# Altium PCB Apollo_ES_Board-V1.1 1.PcbDoc (part 1 of 3)
Units mil, origin at the board's own origin, x right, y up, seen from the top; angles counter-clockwise.
Board outline 984.25 x 614.17 mil, 4 copper layers (Top, Inner Layer 2, Inner Layer 3, Bottom), stack 4.71 mil thick; 86 components, 58 nets, 348 pads, 1209 vias.
Unrouted connection lines stored in the file: 448.
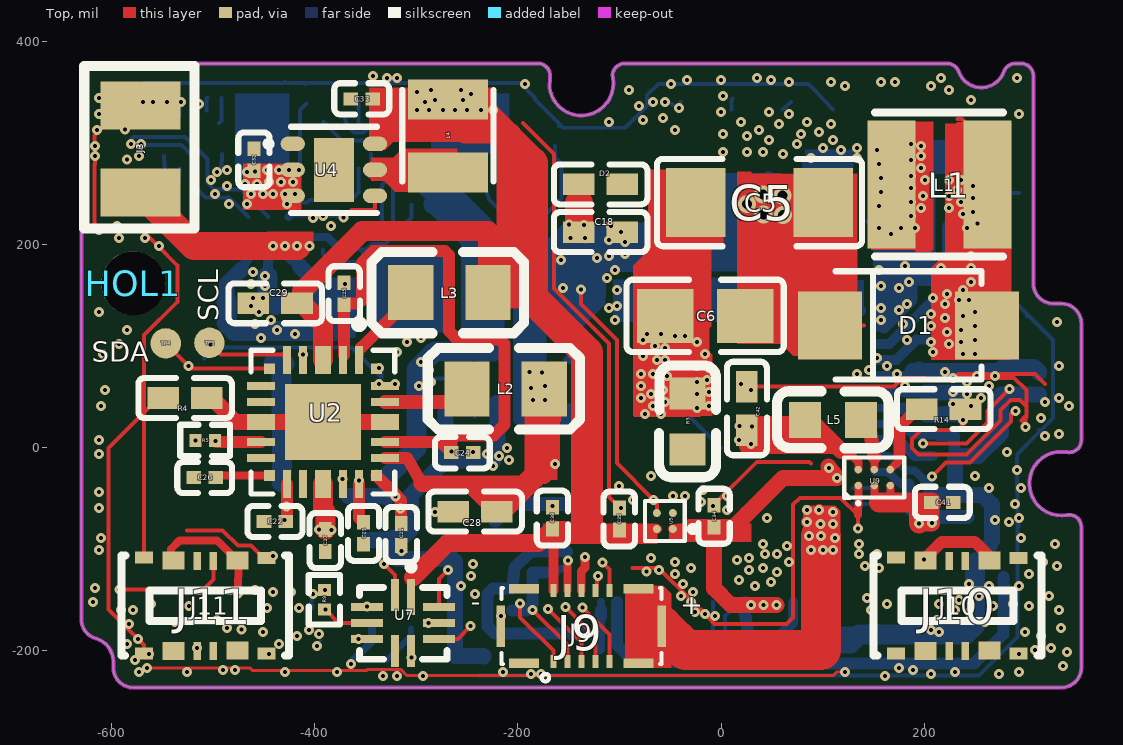
[diagram p0: Top view]
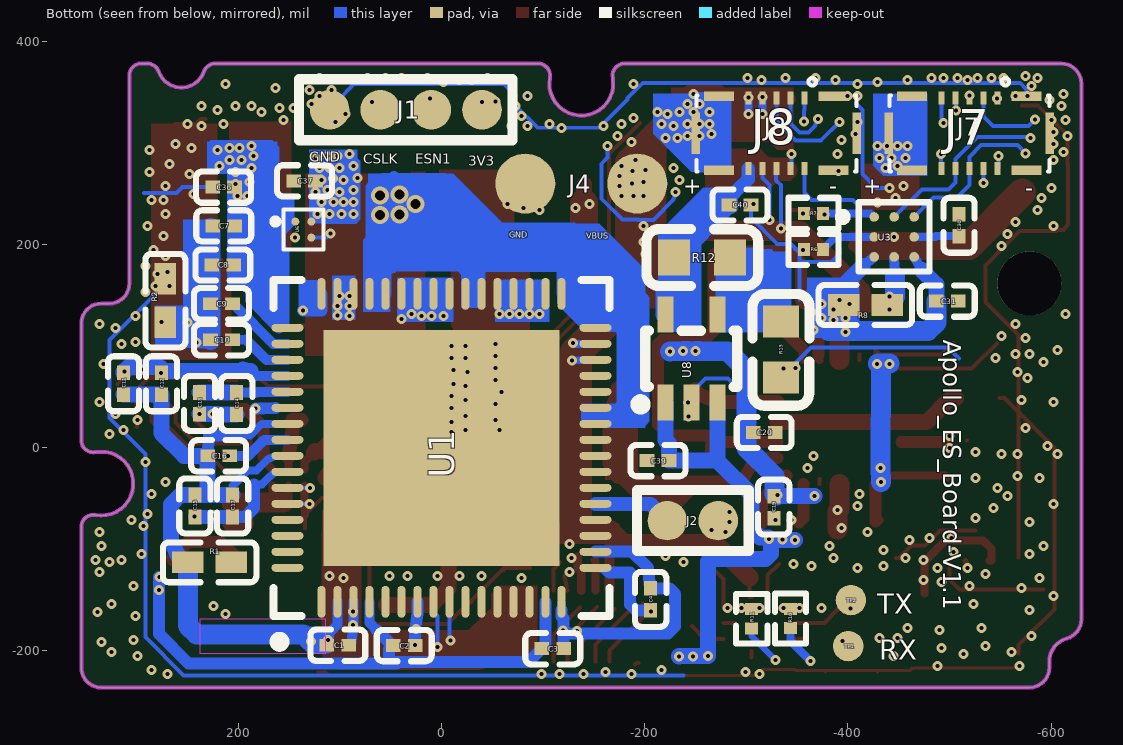
[diagram p1: Bottom view, seen from below]
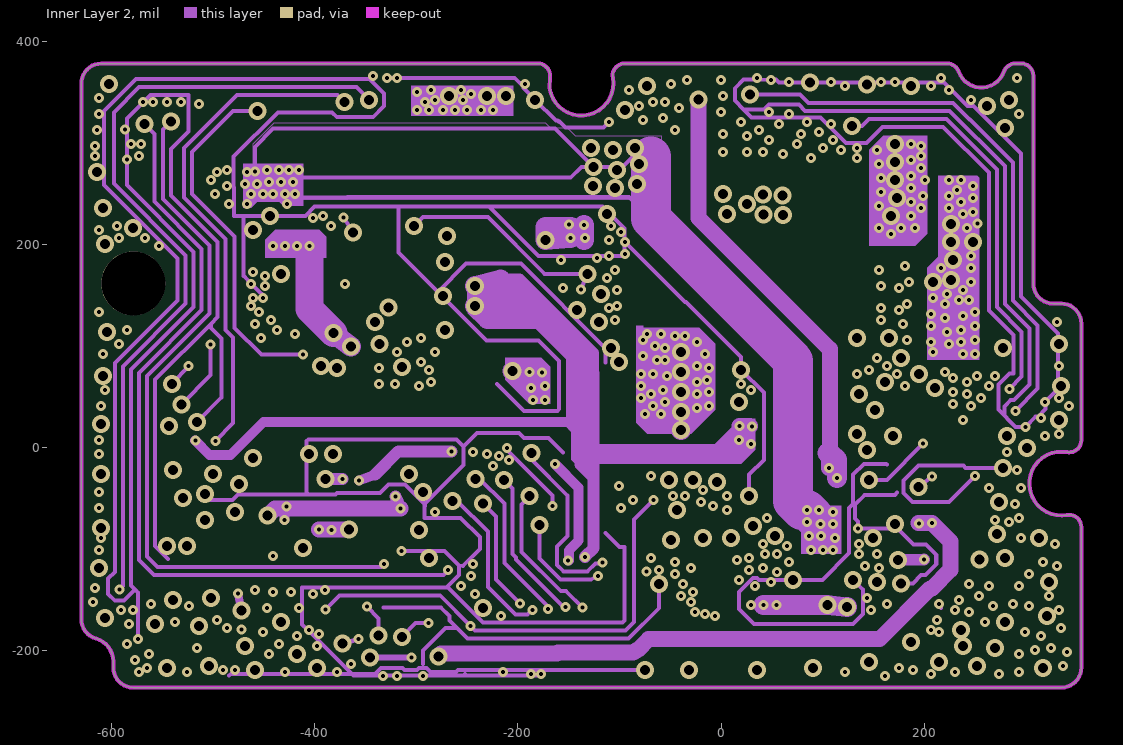
[diagram p2: Inner Layer 2]
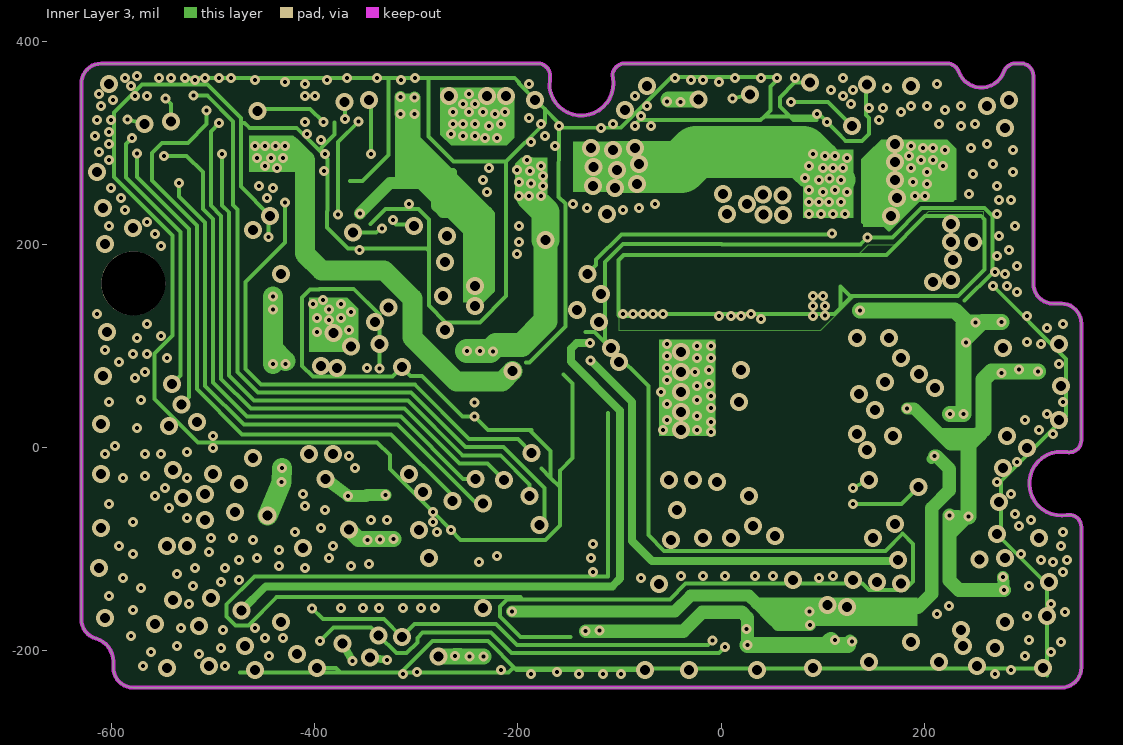
[diagram p3: Inner Layer 3]

## Layer stack, top to bottom
Solder Mask Top: solder mask 0.4, Solder Resist, Dk 3.5
Top: signal copper 1.38
Inner Layer 2: signal copper 0.6
Inner Layer 3: signal copper 1.35
Bottom: signal copper 1.38
Solder Mask Bottom: solder mask 0.4, Solder Resist, Dk 3.5

## Board outline
-598.28,-210.44 ccw(c-621.9,-210.44) -615.47,-187.71 -615.45,-187.71 cw(c-610.09,-168.77) -629.77,-168.77 -629.77,358.46 cw(c-610.09,358.46) -610.09,378.15 -180.23,378.15 cw(c-180.23,366.34) -168.62,364.18 -168.85,354.19 ccw(c-137.65,358.46) -106.68,364.2 -106.68,364.18 cw(c-95.04,366.32) -95.06,378.15 222.64,378.15 cw(c222.64,366.33) 233.78,370.27 233.79,370.26 ccw(c256.05,378.15) 278.33,370.3 278.32,370.27 cw(c289.47,366.33) 289.47,378.15 295.42,378.15 cw(c295.42,366.33) 307.23,366.35 307.23,161.61 ccw(c326.92,161.61) 326.92,141.93 334.79,141.93 cw(c334.79,122.24) 354.48,122.24 354.48,7.35 cw(c342.67,7.35) 340.51,-4.27 330.53,-4.03 ccw(c334.8,-35.24) 340.54,-66.21 340.51,-66.21 cw(c342.67,-77.82) 354.48,-77.82 354.48,-216.34 cw(c334.79,-216.34) 334.79,-236.03 -578.59,-236.03 cw(c-578.59,-216.34) -598.28,-216.34

## Design rules (kind name [scope] priority, off if disabled: settings)
Clearance "Clearance - Default - DEFAULT- SMD" [IsVia vs IsSMTPin] p1: gap=0 ignorepadtopadclearanceinfootprint=FALSE
Clearance "Clearance - Default - DEFAULT - Via" [IsVia vs IsVia] p2: gap=0 ignorepadtopadclearanceinfootprint=FALSE
Clearance "Clearance - Default - DEFAULT - Net" [All] p3: gap=3.94 ignorepadtopadclearanceinfootprint=FALSE except(0: Arc-Hole Track-Hole SMDPad-Hole THPad-Hole Via-Hole Fill-Hole Poly-Hole Region-Hole Text-Hole; 10: Text-Text)
ComponentClearance "ComponentClearance - Default - DEFAULT" [All] p1: gap=0 collisioncheckmode=3 verticalgap=10 showdistances=FALSE
FanoutControl Fanout_Small [(CompPinCount < 5)] p3: bgadir=Out bgaviamode=Centered fanoutstyle=Auto fanoutdirection=OutThenIn viagrid=1 // Fanout_Small (Default Rule)
FanoutControl Fanout_SOIC [IsSOIC] p4: bgadir=Out bgaviamode=Centered fanoutstyle=Auto fanoutdirection=Alternating viagrid=1 // Fanout_SOIC (Default Rule)
HoleToHoleClearance "HoleToHoleClearance - Default - DEFAULT" [All] p1: gap=0 allowstackedmicrovias=TRUE
Length "Default Length" [All] p1: maxlimit=50000 minlimit=0
MaxMinImpedance "Default Impedance" [All] p1: minimum=50.00 maximum=150.0
ParallelSegment "Default Parallel Segment Same Layer" [All] p1: limit=10000 gap=200
ParallelSegment "Default Parallel Segment Adjasent" [All] p2: limit=10000 gap=200
PlaneConnect "Default PlaneConnect" [All] p1: planeconnectstyle=Direct reliefexpansion=20 reliefentries=4 reliefconductorwidth=10 reliefairgap=10
PolygonConnect "PolygonConnect - Default SMT" [IsSMTPin] p1: connectstyle=Direct reliefconductorwidth=10 reliefentries=4 polygonreliefangle="45 Angle" airgapwidth=10
PolygonConnect "PolygonConnect - Default Pad" [All] p2: connectstyle=Direct reliefconductorwidth=10 reliefentries=4 polygonreliefangle="45 Angle" airgapwidth=10
RoomDefinition "Room: DRW71465800" [All vs False] p1: confinementstyle=ConfineOut formatcopy=TRUE lockcomponents=FALSE outline 278.32,370.29 ccw(c278.32,370.27) 278.32,370.25 ccw(c278.32,370.27) 278.32,370.29
RoomDefinition "Room: DRW57261278" [All vs False] p2: confinementstyle=ConfineOut formatcopy=TRUE lockcomponents=FALSE outline -610.16,163.57 ccw(c-610.16,161.6) -610.16,159.63 -547.17,159.63 ccw(c-547.17,161.6) -547.17,163.57 -610.16,163.57
RoomDefinition "Room: DRW37243837" [All vs False] p3: confinementstyle=ConfineOut formatcopy=TRUE lockcomponents=FALSE outline 233.78,370.29 ccw(c233.78,370.27) 233.78,370.25 ccw(c233.78,370.27) 233.78,370.29
RoutingLayers "RoutingLayers - Default - DEFAULT" [All] p1: top layer_v5=TRUE mid layer 1_v5=TRUE mid layer 2_v5=TRUE bottom layer_v5=TRUE
RoutingPriority "RoutingPriority - Default - DEFAULT" [All] p1: routingpriority=0
RoutingTopology "Default Routing Topology" [All] p1: topology=Shortest
RoutingVias "RoutingVias - Default - DEFAULT" [All] p1: holewidth=37 width=55 viastyle="Through Hole" minholewidth=37 minwidth=55 maxholewidth=37 maxwidth=55
SMDToCorner "SMDToCorner - Default - DEFAULT" [All] p1: distance=0
SolderMaskExpansion [All] p1: expansion=4 istentingtop=FALSE
Width "Default Width" [All] p1: maxlimit=118.11 minlimit=3.94 preferedwidth=3.94
22 further rules are at their usual default settings.

## Components (designator, comment, footprint, x,y, rotation, side; value= is the part's Value field where it differs from the comment)
C1 "C0201$2F$2" C0201$2F$2 102.04,-194.38 r0 bottom
C2 "C0201$2F$2" C0201$2F$2 36.62,-194.7 r180 bottom
C3 "C0201$2F$2" C0201$2F$2 -109.55,-197.79 r180 bottom
C4 "C0201$2F$2" C0201$2F$2 -205.92,-149.2 r90 bottom
C5 "C1206" C1206 37.72,241.37 r180 top
C6 "C0805" C0805 -15.75,129.82 r180 top
C7 "C0201$2F$2" C0201$2F$2 214.29,218.41 r0 bottom
C8 "C0201$2F$2" C0201$2F$2 215.22,179.83 r180 bottom
C9 "C0201$2F$2" C0201$2F$2 216.54,141.73 r0 bottom
C10 "C0201$2F$2" C0201$2F$2 216.54,106.3 r0 bottom
C11 "C0201$2F$2" C0201$2F$2 312.99,62.99 r270 bottom
C12 "C0201$2F$2" C0201$2F$2 275.59,62.99 r90 bottom
C13 "C0201$2F$2" C0201$2F$2 238.07,43.69 r90 bottom
C14 "C0201$2F$2" C0201$2F$2 201.54,43.63 r270 bottom
C15 "C0201$2F$2" C0201$2F$2 242.69,-57.3 r90 bottom
C16 "C0201$2F$2" C0201$2F$2 219.31,-7.88 r0 bottom
C17 "C0201$2F$2" C0201$2F$2 205.53,-57.3 r90 bottom
C18 "C0402$2F$2" C0402$2F$2 -166.66,187.3 r0 top
C19 "C0201$2F$2" C0201$2F$2 -327.09,-58.46 r90 bottom
C20 "C0201$2F$2" C0201$2F$2 -317.66,15.01 r180 bottom
C21 "C0201$2F$2" C0201$2F$2 -314.89,-85.31 r90 top
C22 "C0201$2F$2" C0201$2F$2 -439.24,-72.58 r180 top
C23 "C0201$2F$2" C0201$2F$2 -351.98,-84.22 r270 top
C24 "C0201$2F$2" C0201$2F$2 -254.81,-4.83 r0 top
C25 "C0201$2F$2" C0201$2F$2 -371.02,151.64 r270 top
C26 "C0201$2F$2" C0201$2F$2 -508.33,-29.33 r180 top
C27 "C0201$2F$2" C0201$2F$2 -389.68,-91.31 r270 top
C28 "C0402$2F$2" C0402$2F$2 -194.26,-37.82 r180 top
C29 "C0402$2F$2" C0402$2F$2 -486.88,117.21 r0 top
C30 "C0201$2F$2" C0201$2F$2 -509.45,219.02 r90 bottom
C31 "C0201$2F$2" C0201$2F$2 -497.79,144.31 r180 bottom
C32 "C0201$2F$2" C0201$2F$2 -459.93,283.41 r90 top
C33 "C0201$2F$2" C0201$2F$2 -353.76,343.43 r180 top
C34 "C0201$2F$2" C0201$2F$2 -6.96,-67.43 r90 top
C35 "C0201$2F$2" C0201$2F$2 -100.28,-70.19 r270 top
C36 "C0201$2F$2" C0201$2F$2 214.44,256.51 r0 bottom
C37 "C0201$2F$2" C0201$2F$2 134.72,262.73 r180 bottom
C38 "C0201$2F$2" C0201$2F$2 -166.16,-69.28 r90 top
C39 "C0201$2F$2" C0201$2F$2 -213.1,-12.63 r0 bottom
C40 "C0201$2F$2" C0201$2F$2 -293.83,238.94 r180 bottom
C41 "C0201" C0201 217.64,-53.8 r0 top
C42 "C0402" C0402 0.34,86.6 r270 top
D1 "SMAF_L3.5-W2.6-LS4.7-RD" SMAF_L3.5-W2.6-LS4.7-RD 184.47,120.48 r0 top
D2 "0402$2F$2" 0402$2F$2 -166.66,234.25 r0 top
HOL1 "DH1_6MMN" DH1_6MMN -578.64,161.71 r0 top
J1 "4PIN_1.27MM" 4PIN_1.27MM 110.13,332.7 r180 bottom
J2 "2PIN_1.27MM" 2PIN_1.27MM -272.38,-71.69 r0 bottom
J3 "MOTOR_PAD" MOTOR_PAD -531.54,361.95 r180 top
J4 "CHG_PAD" CHG_PAD -231.44,299.09 r0 bottom
J7 "CONN-SMD_BK13C06-10DS-2-0.35V-800" CONN-SMD_BK13C06-10DS-2-0.35V-800 -600.04,270.05 r90 bottom
J8 "CONN-SMD_BK13C06-10DS-2-0.35V-800" CONN-SMD_BK13C06-10DS-2-0.35V-800 -410.04,270.05 r90 bottom
J9 "CONN-SMD_BK13C06-10DS-2-0.35V-800" CONN-SMD_BK13C06-10DS-2-0.35V-800 -218.1,-135.92 r270 top
J10 "CONN-SMD_4P-P0.40_5050040812" CONN-SMD_4P-P0.40_5050040812 145.87,-209.3 r0 top
J11 "CONN-SMD_4P-P0.40_5050040812" CONN-SMD_4P-P0.40_5050040812 -594.45,-209.3 r0 top
L1 "IND-SMD_L3.0-W3.0_SMNR3015" IND-SMD_L3.0-W3.0_SMNR3015 214.9,259.02 r0 top
L2 "L0805" L0805 -212.2,58.03 r0 top
L3 "L0805" L0805 -267.57,152.75 r0 top
L4 "IND-SMD_L2.5-W2.0_FNR252012S" IND-SMD_L2.5-W2.0_FNR252012S -315.94,251.39 r90 top
L5 "C0603" C0603 110.22,27.52 r0 top
R1 "0402$2F$2" 0402$2F$2 276.2,-137.75 r180 bottom
R2 "0402$2F$2" 0402$2F$2 246.71,96.83 r90 bottom
R3 "C0603$2F$2" C0603$2F$2 -33.14,25.72 r270 top
R4 "0402$2F$2" 0402$2F$2 -479.67,74.02 r180 top
R5 "RES0201" RES0201 -480.41,-9.36 r180 top
R6 "RES0201" RES0201 -393.66,178.66 r0 bottom
R7 "RES0201" RES0201 -393.66,214.09 r0 bottom
R8 "0402$2F$2" 0402$2F$2 -465.19,165.47 r0 bottom
R9 "RES0201" RES0201 -373.88,-122.17 r270 top
R10 "RES0201" RES0201 -326.84,-195.54 r90 bottom
R11 "RES0201" RES0201 -288.75,-195.76 r90 bottom
R12 "C0603$2F$2" C0603$2F$2 -256.47,187.28 r0 bottom
R13 "C0603$2F$2" C0603$2F$2 -334.19,96.62 r90 bottom
R14 "0402" 0402 267,62.98 r180 top
TP1 "TESTPOINT" TESTPOINT -400.31,-195.16 r270 bottom
TP2 "TESTPOINT" TESTPOINT -403.03,-149.91 r270 bottom
TP3 "TESTPOINT" TESTPOINT -503.66,103.26 r270 top
TP4 "TESTPOINT" TESTPOINT -546.69,102.74 r270 top
U1 "QFN64P800X800X90_HS-65L" QFN64P800X800X90_HS-65L 0,0 r90 bottom
U2 "IC_PCA9420BSAZ" IC_PCA9420BSAZ -391.92,25.3 r270 top
U3 "DSBGA-9_L1.7-W1.6-R3-C3-P0.50-BL" DSBGA-9_L1.7-W1.6-R3-C3-P0.50-BL -481.03,244.61 r270 bottom
U4 "WSON-6_L2.0-W2.0-P0.65-TL-EP" WSON-6_L2.0-W2.0-P0.65-TL-EP -381.19,273.57 r0 top
U5 "WLCSP-4_L0.8-W0.8-R2-C2-P0.40-BL" WLCSP-4_L0.8-W0.8-R2-C2-P0.40-BL -55.47,-72.11 r90 top
U6 "WLCSP-4_L0.8-W0.8-R2-C2-P0.40-BL" WLCSP-4_L0.8-W0.8-R2-C2-P0.40-BL 135.96,214.74 r270 bottom
U7 "QFN-10_L1.4-W1.8-P0.40-BL" QFN-10_L1.4-W1.8-P0.40-BL -313.1,-172.46 r180 top
U8 "SC-70-5_L2.1-W1.3-P0.65-LS2.2-BR" SC-70-5_L2.1-W1.3-P0.65-LS2.2-BR -245.91,87.68 r270 bottom
U9 "DSBGA-6_L1.4-W1.0-R2-C3-P0.40-BL" DSBGA-6_L1.4-W1.0-R2-C3-P0.40-BL 150.67,-29.41 r0 top

## Footprints (in the part's own frame and the unit in brackets; to place one, negate y for a bottom-side part, rotate by r counter-clockwise, add the part's x,y. Pads: shape width x height; smd on the part's side, far side on the other; paste and mask are expansions set on the pad)
2PIN_1.27MM [mil]
  round 39 smd: 1(0,0) 2(50,0)
  silkscreen extent -30,-30 80,30
4PIN_1.27MM [mil]
  round 39 smd: 1(0,0) 2(50,0) 3(100,0) 4(150,0)
  silkscreen extent -30,-30 180,30
0402 [mm]
  rect 0.79x0.54 smd: 1(0.674,0.635) 2(1.764,0.635)
  silkscreen extent 0.05,0.14 2.39,1.13
0402$2F$2 [mm]
  rect 0.79x0.54 smd: 1(0.674,0.635) 2(1.764,0.635)
  silkscreen extent 0.05,0.14 2.39,1.13
C0201 [mil]
  rect 14.51x12.76 smd paste-6.75 mask+2: 1(-10.8,0) 2(10.8,0)
  silkscreen extent -27,-15 27,15
C0201$2F$2 [mil]
  rect 14.51x12.76 smd paste-6.75 mask+2: 1(-10.8,0) 2(10.8,0)
  silkscreen extent -27,-15 27,15
C0402 [mm]
  rect 0.79x0.54 smd: 1(0.674,0.635) 2(1.764,0.635)
  silkscreen extent 0.05,0.14 2.39,1.13
C0402$2F$2 [mm]
  rect 0.79x0.54 smd: 1(0.674,0.635) 2(1.764,0.635)
  silkscreen extent 0.05,0.14 2.39,1.13
C0603 [mm]
  rect 0.8x0.9 smd: 1(-0.7,0) 2(0.7,0)
  silkscreen extent -1.41,-0.71 1.39,0.72
C0603$2F$2 [mm]
  rect 0.8x0.9 smd: 1(-0.7,0) 2(0.7,0)
  silkscreen extent -1.41,-0.71 1.39,0.72
C0805 [mm]
  rect 1.41x1.35 smd: 1(-1,0) 2(1,0)
  silkscreen extent -1.96,-0.9 1.96,0.9
C1206 [mm]
  rect 1.485x1.728 smd: 1(-1.593,0) 2(1.593,0)
  silkscreen extent -2.56,-1.09 2.56,1.09
CHG_PAD [mil]
  round 59.06 smd: 1(38.73,39.09) 2(148.97,39.09)
CONN-SMD_4P-P0.40_5050040812 [mm]
  rect 0.45x0.3 smd mask+0.05: 0(3.732,0.168) 0/2(3.732,2.565) 0/3(0.672,2.572) 0/4(0.672,0.17)
  rect 0.19x0.45 smd mask+0.05: 1(2.002,2.484) 2(2.402,2.485) 3(2.002,0.24) 4(2.402,0.238)
  rect 0.55x0.45 smd mask+0.05: 5(1.402,2.492) 6(3.002,2.497) 7(1.402,0.24) 8(3.002,0.248)
  silkscreen extent 0.1,0.12 4.3,2.62
CONN-SMD_BK13C06-10DS-2-0.35V-800 [mm]
  rect 0.325x0.15 smd mask+0.051: 1(1.89,1.344) 2(1.89,1.694) 3(1.89,2.044) 4(1.89,2.394) 5(1.89,2.744) 6(0.116,2.744) 7(0.116,2.394) 8(0.116,2.044) 9(0.116,1.694) 10(0.116,1.344)
  rect 0.24x0.75 smd mask+0.051: 11(0.074,0.609) 12(1.933,0.609) 13(1.933,3.479) 14(0.074,3.479)
  rect 1.04x0.215 smd mask+0.051: 15(1.007,0.029) 16(1.007,4.059)
  silkscreen extent 0.05,0.04 2.39,4.04
DH1_6MMN [mm]
  round 1.6 hole 1.6 unplated: 1(0,0)
DSBGA-6_L1.4-W1.0-R2-C3-P0.40-BL [mm]
  round 0.185 smd mask+0.05: A1(-0.4,-0.2) A2(-0.4,0.2) B1(0,-0.2) B2(0,0.2) C1(0.4,-0.2) C2(0.4,0.2)
  silkscreen extent -0.75,-0.68 0.75,0.5
DSBGA-9_L1.7-W1.6-R3-C3-P0.50-BL [mm]
  round 0.24 smd paste-0.107 mask+0.038: A1(0.442,-1.4) A2(0.442,-0.9) A3(0.442,-0.4) B1(0.942,-1.4) B2(0.942,-0.9) B3(0.942,-0.4) C1(1.442,-1.4) C2(1.442,-0.9) C3(1.442,-0.4)
  silkscreen extent 0.08,-2.29 1.81,-0.01
IC_PCA9420BSAZ [mm]
  rect 0.7x0.2 smd: 1(-1.55,0.9) 2(-1.55,0.5) 4(-1.55,-0.5) 5(-1.55,-0.9) 13(1.55,-0.9) 14(1.55,-0.5) 16(1.55,0.5) 17(1.55,0.9)
  rect 0.7x0.4 smd: 3(-1.55,0) 15(1.55,0)
  rect 0.27x0.27 smd mask+0.05: 6(-1.335,-1.335) 12(1.335,-1.335)
  rect 0.2x0.7 smd: 7(-0.9,-1.55) 8(-0.5,-1.55) 10(0.5,-1.55) 11(0.9,-1.55) 19(0.9,1.55) 20(0.5,1.55) 22(-0.5,1.55) 23(-0.9,1.55)
  rect 0.4x0.7 smd: 9(0,-1.55) 21(0,1.55)
  rrect0% 0.27x0.27 smd mask+0.05: 18(1.335,1.335) 24(-1.335,1.335)
  rect 1.9x1.9 smd paste-0.937 mask+0.05: 25(0,0)
  silkscreen extent -2.55,-1.8 1.8,1.8
IND-SMD_L2.5-W2.0_FNR252012S [mm]
  rect 1x2 smd mask+0.051: 1(2.326,-1.194) 2(0.5,-1.194)
  silkscreen extent 0.27,-2.34 2.56,-0.05
IND-SMD_L3.0-W3.0_SMNR3015 [mm]
  rect 1.2x3.2 smd mask+0.051: 1(-1.2,0) 2(1.2,0)
  silkscreen extent -1.62,-1.8 1.58,1.8
L0805 [mil]
  rect 44.59x54.21 smd: 1(-38.05,0) 2(38.04,0)
  silkscreen extent -77,-40 73,40
MOTOR_PAD [mm]
  rect 2x1.2 smd: 1(1.015,2.812) 2(1.015,0.643)
  silkscreen extent -0.33,-0.35 2.42,3.71
QFN64P800X800X90_HS-65L [mm]
  oval 0.8x0.2 smd: 1(-3.85,3) 2(-3.85,2.6) 3(-3.85,2.2) 4(-3.85,1.8) 5(-3.85,1.4) 6(-3.85,1) 7(-3.85,0.6) 8(-3.85,0.2) 9(-3.85,-0.2) 10(-3.85,-0.6) 11(-3.85,-1) 12(-3.85,-1.4) 13(-3.85,-1.8) 14(-3.85,-2.2) 15(-3.85,-2.6) 16(-3.85,-3) 33(3.85,-3) 34(3.85,-2.6) 35(3.85,-2.2) 36(3.85,-1.8) 37(3.85,-1.4) 38(3.85,-1) 39(3.85,-0.6) 40(3.85,-0.2) 41(3.85,0.2) 42(3.85,0.6) 43(3.85,1) 44(3.85,1.4) 45(3.85,1.8) 46(3.85,2.2) 47(3.85,2.6) 48(3.85,3)
  oval 0.2x0.8 smd: 17(-3,-3.85) 18(-2.6,-3.85) 19(-2.2,-3.85) 20(-1.8,-3.85) 21(-1.4,-3.85) 22(-1,-3.85) 23(-0.6,-3.85) 24(-0.2,-3.85) 25(0.2,-3.85) 26(0.6,-3.85) 27(1,-3.85) 28(1.4,-3.85) 29(1.8,-3.85) 30(2.2,-3.85) 31(2.6,-3.85) 32(3,-3.85) 49(3,3.85) 50(2.6,3.85) 51(2.2,3.85) 52(1.8,3.85) 53(1.4,3.85) 54(1,3.85) 55(0.6,3.85) 56(0.2,3.85) 57(-0.2,3.85) 58(-0.6,3.85) 59(-1,3.85) 60(-1.4,3.85) 61(-1.8,3.85) 62(-2.2,3.85) 63(-2.6,3.85) 64(-3,3.85)
  rect 5.9x5.9 smd: 65(0,0)
  silkscreen extent -4.97,-4.2 4.2,4.2
QFN-10_L1.4-W1.8-P0.40-BL [mm]
  rect 0.2x0.9 smd mask+0.05: 1(-0.2,-0.65)
  rect 0.2x0.8 smd mask+0.05: 2(0.2,-0.7) 6(0.2,0.7) 7(-0.2,0.7)
  rect 0.8x0.2 smd mask+0.05: 3(0.9,-0.4) 4(0.9,0) 5(0.9,0.4) 8(-0.9,0.4) 9(-0.9,0) 10(-0.9,-0.4)
  silkscreen extent -1.1,-1.48 1.09,0.91
RES0201 [mil]
  rect 11.93x12.76 smd paste-5.88 mask+2: 1(17.97,-16.62) 2(36.99,-16.62)
  silkscreen extent 3,-32 52,-1
SC-70-5_L2.1-W1.3-P0.65-LS2.2-BR [mm]
  rect 0.9x0.4 smd: 1(1.1,-0.65) 2(1.1,0) 3(1.1,0.65) 4(-1.1,0.65) 5(-1.1,-0.65)
  silkscreen extent -0.7,-1.4 1.27,1.15
SMAF_L3.5-W2.6-LS4.7-RD [mm]
  rect 1.6x1.7 smd mask+0.051: 1(-1.96,0.001) 2(1.96,0.001)
  silkscreen extent -1.83,-1.35 1.83,1.35
TESTPOINT [mil]
  round 30 smd: 1(0,0)
WLCSP-4_L0.8-W0.8-R2-C2-P0.40-BL [mm]
  round 0.2 smd paste-0.087 mask+0.051: A1(-0.2,-0.2) A2(-0.2,0.2) B1(0.2,-0.2) B2(0.2,0.2)
  silkscreen extent -0.5,-0.78 0.5,0.5
WSON-6_L2.0-W2.0-P0.65-TL-EP [mm]
  oval 0.607x0.364 smd: 1(-1.028,0.65) 2(-1.028,0) 3(-1.028,-0.65) 4(1.028,-0.65) 5(1.028,0) 6(1.028,0.65)
  rect 1x1.6 smd: 7(0,0)
  silkscreen extent -1.71,-1.08 1.08,1.08

## Via types
v1: diameter 9.84, hole 3.94, Top to Inner Layer 2, 528 vias
v2: diameter 9.84, hole 3.94, Inner Layer 3 to Bottom, 478 vias
v3: diameter 17.72, hole 9.84, Inner Layer 2 to Inner Layer 3, 198 vias
v4: diameter 17.72, hole 9.84, Top to Bottom, 5 vias

## Nets (pads, with @x,y where several pads share a name; then routed paths per layer and width w, separated by ;. In a path a pad name is that pad's centre, name@x,y a point inside that pad or via, vN(x,y) a via of type N, cw(c..) or ccw(c..) an arc to the next point about the centre after c; other vN are vias at no path point)
AGND: R4.1 U2.9 U2.21 U2.25 | length 185.1
  Top w15.75: R4.1@-506.19,49.02 -501.27,49.02 -477.55,25.3 U2.9@-452.94,25.3 U2.25@-391.92,25.3 U2.21@-330.9,25.3
AVSS: C7.2 C8.1 C9.2 C10.2 C13.1 C14.2 R2.1 U1.48 | length 655
  Inner Layer 3 w9.84: v2@238.34,105.18 v2(241.2,103.39)
  Inner Layer 3 w15.75: v2(136.47,135.33) 229.72,135.33 241.2,123.85 ; v2(225.4,33.31) v2(238.34,33.16) v2@238.34,105.18 ; v2(275.71,123.85) 257.01,123.85 ; v2@238.34,105.18 257.01,123.85 ; v2@238.34,105.18 238.34,120.99 241.2,123.85 ; 241.2,123.85 v2(250.1,123.35) 257.01,123.85
  Bottom w3.94: C14.2@201.54,32.83 201.54,31.27 219,31.27 ; 219.77,32.83 219,31.27 ; C7.2@225.08,218.41 C7.2@227.33,218.41 ; v2(225.4,33.31) 219,31.27 ; C8.1@226.02,179.83 C8.1@226.02,180.45 ; C10.2@227.33,105.67 C10.2@227.91,105.72
  Bottom w4.42: C10.2@227.33,105.67 C10.2@230.24,103.39
  Bottom w5.22: C10.2@227.91,105.72 C10.2@230.24,103.39
  Bottom w10.96: 219,31.27 220.25,33.31
  Bottom w11.63: R2.1@271.71,123.35 v2(275.71,123.85)
  Bottom w11.81: U1.48@118.11,151.57 118.11,135.33 v2(136.47,135.33) ; C10.2@227.33,106.3 230.24,103.39 v2(241.2,103.39)
  Bottom w12.76: C9.2@227.33,137.53 C9.2@227.33,141.73
  Bottom w13.33: C7.2@225.08,218.41 C7.2@227.33,216.17
  Bottom w15.19: C7.2@227.33,216.17 C7.2@227.33,218.41
  Bottom w15.75: C14.2@201.54,32.83 219.77,32.83 ; v2(238.34,33.16) v2(225.4,33.31) ; 219.77,32.83 220.25,33.31 v2(225.4,33.31) ; 219.77,32.83 v2(225.4,33.31)
  Bottom w17.06: C8.1@226.02,179.83 227.33,181.76 C8.1@226.02,180.45
  Bottom w18.05: C10.2@227.33,106.3 C10.2@227.91,105.72
  Bottom w18.42: C10.2@227.33,105.67 C10.2@227.33,106.3
  Bottom w19.68: C10.2@227.33,106.3 227.33,123.35 ; C9.2@227.33,137.53 227.33,123.35 ; R2.1@271.71,123.35 v2(250.1,123.35) 227.33,123.35 ; C9.2@227.33,141.73 227.33,181.76 227.33,216.17 C9.2@227.33,141.73
BOOST_OUT: C5.1 C6.1 D1.1 U1.26 U1.27 U1.32 U1.33 U1.38 U1.39 U1.44 U1.45 | length 1943.5
  Top w3.94: 38.85,164.44 36.11,161.7 30.59,161.7 C6.1@18.35,149.46 ; v4(41.17,249.04) 41.17,248.6 v4@27.22,248.6 ; v4(41.43,229.55) 39.07,227.19 27.22,227.19 ; v4(60.67,229.19) 100.42,229.19 C5.1@100.42,241.37 ; 140.77,120.53 D1.1@131.62,120.53 ; C6.1@18.35,149.46 C6.1@23.62,129.82 ; C6.1@18.35,149.46 C6.1@23.62,144.19 ; C6.1@23.62,129.82 C6.1@25.43,120.53 ; C6.1@23.62,129.82 23.62,122.34 C6.1@25.43,120.53 ; C6.1@23.62,129.82 20.48,129.82 C6.1@23.62,132.96 ; C6.1@23.62,129.82 C6.1@23.62,132.96 ; C6.1@23.62,129.82 C6.1@23.62,144.19 ; C6.1@23.62,129.82 C6.1@29.33,138.67 ; C6.1@23.62,129.82 C6.1@31.45,138.67 ; C6.1@23.62,129.82 C6.1@31.45,147.42 ; C6.1@23.62,129.82 C6.1@27.22,151.65 ; C6.1@23.62,132.96 C6.1@23.62,144.19 ; C6.1@23.62,132.96 C6.1@29.33,138.67 ; C6.1@25.43,120.53 D1.1@107.3,120.53 D1.1@131.62,120.53 ; C6.1@27.22,151.65 C6.1@31.45,147.42 ; C6.1@27.22,151.65 27.22,227.19 ; 27.22,227.19 v4@27.22,240.16 ; v4@27.22,240.16 v4@27.22,248.6 ; v4@27.22,240.16 v4(25.59,240.16) v4@27.22,248.6 ; v4@27.22,248.6 27.22,254.01 36.88,263.67 91.22,263.67 100.42,254.47 C5.1@100.42,241.37 ; C6.1@29.33,138.67 C6.1@31.45,138.67 ; C6.1@31.45,138.67 C6.1@31.45,147.42 ; C5.1@100.42,241.37 101.45,241.37 131.62,211.2 D1.1@131.62,120.53
  Bottom w3.94: U1.32@-151.57,118.11 -139.76,118.11 -118.11,139.76 U1.33@-118.11,151.57 ; U1.38@-39.37,151.57 -39.29,190.68 -39.29,217.9 ; 47.78,242.08 v4(60.67,229.19)
  Bottom w7.87: U1.26@-151.57,23.62 -197.29,23.62 -200.97,27.3 -200.97,146.88 -129.95,217.9 -116.7,217.9 ; U1.27@-151.57,39.37 -172.35,39.37 -176.02,43.04 -176.02,114.81 -172.72,118.11 U1.32@-151.57,118.11 ; -118.11,216.49 -116.7,217.9 ; U1.39@-23.62,151.57 -23.62,171.26 -17.23,177.65 48.9,177.65 ; v4(60.47,248.42) 67.86,255.8 ; 70.87,177.66 70.87,252.79 ; -116.7,217.9 -39.29,217.9 -11.26,217.9 -6.7,222.46 -6.7,259.36 -8.53,261.19 -3.42,266.3 46.75,266.3 57.36,266.3 67.86,255.8 ; 67.86,255.8 70.87,256.92 70.87,252.79 ; 67.86,255.8 70.87,252.79
  Bottom w9.75: 46.75,242.08 47.78,242.08
  Bottom w9.84: U1.33@-118.11,151.57 -118.11,216.49
  Bottom w11.81: v4(41.17,249.04) 46.75,242.08 ; v4(41.43,229.55) 46.75,219.14 ; 46.75,266.3 46.75,242.08 ; U1.44@55.12,151.57 55.12,173.23 50.7,177.65 48.9,177.65 48.9,216.99 46.75,219.14 ; U1.45@70.87,151.57 70.87,163.39 70.87,177.66 ; 46.75,219.14 46.75,242.08
DVSS: C1.2 C2.2 C3.2 C4.2 C11.2 C12.1 C15.2 C16.2 C17.2 R1.1 U1.2 U1.7 U1.16 U1.18 U1.55 U1.57 | length 1563.3
  Inner Layer 3 w3.94: v2(111.8,-189.1) v2@126.82,-189.1
  Inner Layer 3 w4.65: 125.06,-194.36 v2@126.82,-189.1
  Inner Layer 3 w9.84: 102.8,-194.36 v2(111.8,-189.1) v2@108.06,-189.1 ; 125.06,-194.36 v2(128.57,-190.85)
  Inner Layer 3 w10.8: v2@126.82,-189.1 v2(128.57,-190.85)
  Inner Layer 3 w11.19: v2(24.93,-178.32) v2@25.83,-177.42
  Inner Layer 3 w12.15: v2@-119.69,-180.52 v2(-119.69,-180.1)
  Inner Layer 3 w12.99: v2(-133.42,-180.52) -119.69,-180.52 -37.18,-180.52 -18.56,-161.9 20.64,-161.9 25.83,-167.09 25.83,-177.42 v2(25.83,-194.36)
  Inner Layer 3 w15.75: v2(25.83,-194.36) 102.8,-194.36 ; v2@108.06,-189.1 102.8,-194.36 ; 125.06,-194.36 102.8,-194.36
  Bottom w3.94: C3.2@-122.53,-197.79 -122.53,-181 v2@-122.24,-181 ; 128.52,-184.25 v2@132.58,-190.85 ; v2(128.57,-190.85) v2@132.58,-190.85 ; 129.08,-183.69 v2@132.58,-190.85 ; v2@-122.24,-181 -120.35,-180.76 v2(-119.69,-180.1) v2@-122.24,-181
  Bottom w4.12: v2@127.96,-194.38 v2@132.58,-190.85
  Bottom w5.19: C1.2@111.8,-194.38 v2(111.8,-189.1)
  Bottom w7.26: C1.2@110.51,-194.38 C1.2@111.8,-194.38
  Bottom w7.42: v2@-122.53,-181 v2@-120.35,-180.76
  Bottom w7.45: C3.2@-122.53,-197.79 C3.2@-120.35,-197.79
  Bottom w7.62: v2@128.52,-193.82 v2@132.58,-190.85
  Bottom w7.87: U1.16@-118.11,-159.66 U1.16@-118.11,-151.57 ; U1.57@151.57,-7.87 163.39,-7.87 171.06,-11.34 181.94,-22.22 190.25,-22.22 205.53,-37.5 C17.2@205.53,-46.5 ; U1.55@151.57,23.62 176.85,23.62 188.5,11.97 213.97,11.97
  Bottom w8.03: v2@-122.53,-181 -120.35,-182.89 v2@-122.24,-181
  Bottom w9.84: v2(-133.42,-180.52) v2@-132.93,-182.89 ; v2@-120.35,-182.89 v2(-119.69,-180.1) ; U1.2@102.36,-151.57 102.36,-174.08 110.51,-182.23 ; C1.2@112.83,-194.38 v2(111.8,-189.1) ; C1.2@110.51,-189.1 110.51,-194.38 v2(111.8,-189.1) ; C1.2@110.51,-189.1 110.51,-182.23 ; C1.2@110.51,-189.1 v2(111.8,-189.1) ; 110.51,-182.23 117.21,-183.69 v2(111.8,-189.1)
  Bottom w10.02: v2(24.93,-178.32) v2@25.83,-178.35
  Bottom w11.1: C1.2@110.51,-194.38 C1.2@112.83,-194.38
  Bottom w11.69: U1.18@-151.62,-102.32 U1.18@-151.57,-102.36
  Bottom w11.81: U1.18@-151.62,-102.32 -187.59,-102.32 -203.49,-118.22 C4.2@-205.45,-137.06 ; C3.2@-120.35,-197.79 v2@-120.35,-182.89 ; U1.16@-118.11,-159.66 -118.11,-165.99 -120.35,-168.23 -120.35,-180.76 v2@-120.35,-182.89 ; U1.7@23.62,-151.57 23.62,-163.39 25.83,-178.35 v2(25.83,-194.36) ; 213.97,11.97 229,11.97 C16.2@230.1,-7.88 ; C4.2@-205.92,-138.4 -224.45,-138.4 -230.02,-143.97 -230.02,-175.73 -222.86,-182.89 -132.93,-182.89 v2@-120.35,-182.89 ; C4.2@-205.92,-138.4 -205.45,-138.4 C4.2@-205.45,-137.06 ; C4.2@-205.92,-138.4 C4.2@-205.45,-137.06
  Bottom w13.68: C1.2@111.8,-194.38 C1.2@112.83,-194.38
  Bottom w15.75: C1.2@112.83,-194.38 v2@127.96,-194.38 ; 117.21,-183.69 129.08,-183.69 ; 135.73,-183.69 129.08,-183.69 ; C17.2@205.53,-46.5 234.63,-46.5 ; R1.1@249.68,-112.75 256.05,-112.75 266.32,-91.17 266.32,-55.88 256.94,-46.5 C15.2@242.69,-46.5 234.63,-46.5 ; C11.2@312.99,52.2 C12.1@275.59,52.2 275.59,14.44 253.27,-7.88 C16.2@230.1,-7.88 230.1,-41.98 234.63,-46.5 ; v2@127.96,-194.38 128.52,-193.82 v2(128.57,-190.85) ; v2@127.96,-194.38 v2(128.57,-190.85) ; v2(128.57,-190.85) 128.52,-184.25 129.08,-183.69 ; v2(128.57,-190.85) 129.08,-183.69
  Bottom w19.68: v2(128.57,-190.85) 135.73,-183.69 146.8,-183.69 171.14,-183.69 241.05,-183.69 249.68,-175.06 R1.1@249.68,-112.75
ENS1_RX: TP1.1 U1.8 U7.3 | length 523.6
  Top w3.94: v1(-348.81,-156.43) U7.3@-348.53,-156.71
  Inner Layer 2 w3.94: v1(-348.81,-156.43) -337.2,-168.04 v3(-337.2,-184.69)
  Inner Layer 3 w3.94: v2(-394.65,-190.17) -381.54,-177.06 -344.83,-177.06 v3(-337.2,-184.69) -319.7,-202.19 -309.64,-202.19 -299.12,-191.67 -299.12,-187.17 -293.83,-181.88 -226.67,-181.88 -206.36,-202.19 -2.17,-202.19 v2(3.83,-196.19)
  Bottom w3.94: TP1.1@-400.31,-195.16 v2(-394.65,-190.17) ; v2(3.83,-196.19) 3.83,-165.74 7.87,-161.7 U1.8@7.87,-151.57
ENS1_SUP_EN: J8.7 R9.2 U5.B2 U6.B2 U7.4 U7.8 | length 1363.8
  Top w3.94: R9.2@-390.51,-159.16 v1(-389.57,-159.35) -376.8,-172.46 U7.4@-348.53,-172.46 ; U7.8@-277.67,-188.2 -259.1,-188.2 v1(-246.5,-175.6) ; v1(-138.05,155.99) -138.05,141.3 -102.65,105.9 -102.65,-14.79 v1(-66.38,-51.3) -63.34,-54.1 U5.B2@-63.34,-64.24
  Inner Layer 2 w3.94: v1(-389.57,-159.35) -375.82,-145.6 -276.5,-145.6 v1(-246.5,-175.6) -242.16,-179.94 -94.14,-179.94 -85.85,-171.65 -85.85,-70.77 v1(-66.38,-51.3) ; v3(-302.36,218.43) -293.54,227.25 -229.65,227.25 -173.65,171.25 v3(-131.61,171.25) v1(-138.05,155.99)
  Inner Layer 3 w3.94: v2(-322.93,224.21) -322.93,222.75 -320.08,219.89 -302.36,219.89 v3(-302.36,218.43) ; v3(-131.61,171.25) -123.12,179.74 -123.12,185.24 -98.25,210.11 108.42,210.11 v2(109.17,210.86)
  Bottom w3.94: v2(-322.93,224.21) -322.93,258.42 -315.78,265.57 J8.7@-315.78,274.63 ; v2(109.17,210.86) 113.16,206.87 U6.B2@128.09,206.87
ENS1_TX: TP2.1 U1.9 U7.9 | length 510.9
  Top w3.94: v1(-287.86,-172.46) U7.9@-277.67,-172.46
  Inner Layer 2 w3.94: v3(-314.38,-186.05) -300.79,-172.46 v1(-287.86,-172.46)
  Inner Layer 3 w3.94: v2(-402.7,-157.96) -392.02,-168.64 -331.79,-168.64 v3(-314.38,-186.05) -301.67,-173.34 -221.71,-173.34 -200.77,-194.28 -13.14,-194.28 v2(-8.68,-189.82)
  Bottom w3.94: TP2.1@-403.03,-149.91 v2(-402.7,-157.96) ; v2(-8.68,-189.82) -7.87,-189.82 U1.9@-7.87,-151.57
ENS1_VDD3V3: C1.1 C4.1 C16.1 C34.1 J1.4 U1.3 U1.17 U1.56 U5.A1 | length 1953.4
  Top w9.84: U5.A1@-47.6,-79.98 -30.28,-78.23
  Top w15.75: -30.28,-78.23 C34.1@-6.96,-78.23 ; v1(54.35,-154.82) v1(41.87,-154.82) v1(29.43,-154.94) 9.48,-154.78 -6.96,-138.34 C34.1@-6.96,-78.23 ; v1@105.46,-18.37 106.3,-19.21 v1(106.3,-19.69) v1(114.17,-29.53) 60.98,-29.53 25.59,-64.92 25.59,-65 11.85,-78.74 7.87,-78.74 7.36,-78.23 C34.1@-6.96,-78.23
  Inner Layer 2 w15.75: v3(-22.38,342.62) -22.38,226.39 107.01,97 107.01,-4.56 106.3,-5.27 v1(106.3,-19.69)
  Inner Layer 2 w19.68: v1(41.87,-154.82) v1(54.35,-154.82) v3(104.5,-154.82) v3(124,-156.94) ; 104.5,-5.23 105.17,-4.56 107.01,-4.56 114.17,-11.73 v1(114.17,-29.53)
  Inner Layer 3 w3.94: v3@103.24,-154.82 v3(104.5,-154.82)
  Inner Layer 3 w9.84: v2@207.22,-11.03 v2(210.01,-8.24)
  Inner Layer 3 w10.85: v2(-53.34,340.89) v2@-51.61,342.62
  Inner Layer 3 w11.25: v2(-39.87,340.37) v2@-39.87,342.62
  Inner Layer 3 w11.81: v2(-206.01,-161.12) -45.66,-161.12 -30.1,-145.56 27.41,-145.56 35.01,-153.16 ; v3@100.8,-157.26 103.24,-154.82 88.74,-154.82 ; 35.01,-153.16 49.94,-168.09 ; 35.01,-153.16 57.09,-153.16 ; 49.94,-168.09 67.79,-168.09 ; 49.94,-168.09 49.94,-160.31 57.09,-153.16 ; 49.94,-168.09 56.09,-174.24 v2(87.27,-174.24) 87.27,-170.79 87.09,-168.09 ; 57.09,-153.16 70.38,-153.16 ; 67.79,-168.09 67.79,-155.75 70.38,-153.16 ; 67.79,-168.09 87.09,-168.09 ; 70.38,-153.16 78.94,-153.16 ; 78.94,-153.16 87.08,-153.16 ; 78.94,-153.16 v2(86.89,-161.11) ; v2(86.89,-161.11) 87.09,-168.09 ; v2(86.89,-161.11) 87.08,-153.16 ; v2(86.89,-161.11) 88.74,-154.82 ; 87.08,-153.16 88.74,-154.82
  Inner Layer 3 w12.99: v2@87.27,-170.79 v3@100.8,-157.26 ; v3(104.5,-154.82) v3@100.8,-157.26 ; v2(210.01,-8.24) 211.98,-8.24 224.57,-20.83 224.57,-41.94 207.22,-59.29 207.22,-143.68 193.64,-157.26 133.41,-157.26 v3(124,-156.94) v3@100.8,-157.26
  Inner Layer 3 w15.75: v2@-51.61,342.62 -39.87,342.62 v3(-22.38,342.62)
  Bottom w3.94: v2(-206.01,-161.12) C4.1@-205.92,-160 ; -165.34,-122.86 -164.29,-118.07 U1.17@-160.59,-118.07 ; v2(-53.34,340.89) J1.4@-39.87,332.7 v2(-39.87,340.37) ; U1.3@86.61,-161.11 v2(86.89,-161.11) ; C16.1@208.51,-7.88 v2(210.01,-8.24) ; U1.17@-160.59,-118.07 U1.17@-151.57,-118.11 U1.17@-151.57,-118.11 U1.17@-160.59,-118.07
  Bottom w6.04: U1.17@-162.63,-120.15 U1.17@-160.59,-118.07
  Bottom w6.49: U1.17@-164.29,-118.07 U1.17@-162.63,-120.15
  Bottom w7.87: U1.17@-162.63,-120.15 U1.17@-151.57,-118.11
  Bottom w9.84: v2(87.27,-174.24) v2@86.61,-174.9 ; C1.1@91.24,-194.38 89.09,-194.38 v2@86.61,-174.9 ; U1.56@151.57,7.87 174.37,7.87 190.12,-7.88 C16.1@208.51,-7.88 ; v2@86.61,-174.9 86.61,-161.11 U1.3@86.61,-151.57 v2@86.61,-174.9
  Bottom w11.81: C4.1@-205.92,-160 -191.59,-160 -185.77,-154.18 -185.77,-122.86 -165.34,-122.86 U1.17@-162.63,-120.15
ENS1_VDD5V: C7.1 C8.2 C36.1 L1.1 U1.49 U6.A1 | length 1320.4
  Top w3.94: v1(187.01,283.46) L1.1@187.01,282.53 ; v1(196.85,275.59) v1@198.81,273.62 ; 202.8,236.64 202.8,258.54 ; 205.53,314.12 205.53,275.59 ; L1.1@167.66,259.02 167.66,282.53 L1.1@187.01,282.53 ; L1.1@167.66,259.02 L1.1@187.01,282.53 ; L1.1@167.66,259.02 167.66,219.65 192.68,194.64 205.53,194.64 205.53,258.54 ; L1.1@187.01,282.53 202.74,282.53 202.74,273.62 ; v1@198.81,273.62 202.74,273.62 ; v1@198.81,273.62 195.92,270.73 195.92,268.65 v1(200.79,263.78) v1@202.74,263.78 ; v1@202.74,263.78 202.74,258.54 202.8,258.54 ; v1@202.74,263.78 202.74,273.62 ; 202.74,273.62 204.71,275.59 205.53,275.59 ; 202.8,258.54 205.53,258.54 ; 205.53,258.54 205.53,275.59
  Inner Layer 3 w3.94: v2(188.98,261.81) v2@185.04,263.78 ; v2(198.82,295.28) v2@198.82,294.44 ; v2(202.76,271.65) 192.91,271.65 v2@185.04,263.78 ; v2(208.66,295.28) v2@208.66,294.44 ; 139.71,262.26 139.71,283.37 150.78,294.44 v2@198.82,294.44 ; 139.71,262.26 139.71,222.45 143,219.16 160.92,219.16 165.23,214.84 194.09,243.7 227.87,243.7 227.87,286.3 v2@220.67,293.5 ; 139.71,262.26 151.28,262.26 152.8,263.78 v3(171.26,263.78) v2@185.04,263.78 ; v2@198.82,294.44 v2@208.66,294.44 ; v2@208.66,294.44 v2@219.73,294.44 ; v2@219.73,294.44 v2(220.47,293.31) v2@220.67,293.5 ; v2@219.73,294.44 v2@220.67,293.5
  Bottom w3.94: 154.84,177.93 154.84,211.6 U6.A1@143.83,222.61 161.42,240.2 161.42,295.28 167.32,301.18 226.38,301.18 228.35,299.21 228.35,271.65 v2@206.69,271.65 ; 156.33,176.44 183.99,176.44 ; C8.2@204.43,179.83 204.43,198.65 203.49,199.59 C7.1@203.49,218.41 203.49,237.38 203.64,237.54 C36.1@203.64,256.51 ; v2(202.76,259.84) 202.76,256.51 C36.1@203.64,256.51 ; v2(202.76,259.84) v2@202.76,268.6 ; v2(202.76,259.84) C36.1@203.64,259.84 ; v2@202.76,268.6 v2(202.76,271.65) ; v2@202.76,268.6 v2@203.64,268.6 ; v2(202.76,271.65) v2@203.64,268.6 ; v2(202.76,271.65) v2@206.69,271.65 ; C36.1@203.64,256.51 v2@203.64,268.6 ; C36.1@203.64,256.51 C36.1@203.64,259.84 ; C36.1@203.64,259.84 v2@203.64,268.6 ; v2@203.64,268.6 v2@206.69,271.65
  Bottom w5.03: 183.99,176.44 187.38,179.83
  Bottom w7.6: 154.84,177.93 156.33,176.44
  Bottom w7.87: U1.49@151.57,118.11 U1.49@160.15,118.33
  Bottom w11.81: 156.33,176.44 160.15,172.62 160.15,118.33 187.38,145.56 187.38,179.83 C8.2@204.43,179.83
  other v1: 167.32,210.63 155.51,216.54 177.17,216.54 190.94,216.54 187.01,228.35 196.85,236.22 155.51,238.19 187.01,242.13 198.82,248.03 157.48,251.97 187.01,255.91 157.48,265.75 187.01,267.72 155.51,279.53 196.85,287.4 153.54,293.31 196.85,297.24 187.01,299.21
  other v2: 190.94,248.03 200.79,248.03 187.01,275.59 218.5,277.56 196.85,283.46 208.66,283.46 185.04,287.4 187.01,297.24
  other v3: 167.32,228.35 173.23,246.06 171.26,281.5 171.26,299.21
ESN1_SWCLK: J1.2 U1.59 | length 700.9
  Top w3.94: v1(198.86,4.31) 241.34,4.31 261.94,24.91 261.94,36.11 v1(283.76,57.93) v1@283.76,57.3
  Inner Layer 2 w3.94: v3(128.72,316.77) 138.71,316.77 145.69,323.75 221.67,323.75 271.38,274.05 271.38,138.38 295.75,114.02 295.75,69.92 v1(283.76,57.93) ; v3(145.67,-31.5) 163.05,-31.5 v1(198.86,4.31)
  Inner Layer 3 w3.94: v2(68.59,340.37) 105.12,340.37 v3(128.72,316.77) ; v2(129.56,-39.37) v3(145.67,-31.5)
  Bottom w3.94: J1.2@60.13,332.7 v2(68.59,340.37) ; v2(129.56,-39.37) U1.59@151.57,-39.37
ESN1_SWDIO: J1.3 U1.60 | length 802.7
  Top w3.94: v1(207.45,-28.47) 221.39,-14.53 244.77,-14.53 285.36,26.06 285.36,33.94 287.69,36.27 v1(289.5,36.27)
  Inner Layer 2 w3.94: v3(28.18,347.73) 77.59,347.73 85.81,339.51 228.19,339.51 244.65,323.05 244.98,323.05 287.13,280.9 287.13,144.9 311.5,120.54 311.5,58.27 v1(289.5,36.27) ; v3(194.29,-38.48) v1(207.45,-28.47)
  Inner Layer 3 w3.94: v2(11.32,343.89) v3(28.18,347.73) ; v2(129.75,-55.12) 177.65,-55.12 v3(194.29,-38.48)
  Bottom w3.94: J1.3@10.13,332.7 10.13,342.7 v2(11.32,343.89) ; v2(129.75,-55.12) U1.60@151.57,-55.12
FG_GPOUT: J8.1 R7.1 U3.A1 | length 177
  Inner Layer 3 w3.94: v2(-377.15,229.6) -377.15,300.88 v2(-356.72,321.31)
  Bottom w3.94: J8.1@-357.11,344.47 -357.11,332.35 -356.72,331.95 v2(-356.72,321.31)
  Bottom w7.87: U3.A1@-425.92,227.19 -422.4,230.71 R7.1@-375.7,230.71 v2(-377.15,229.6)
GH3020_INT: J7.3 J9.7 | length 807.8
  Top w3.94: v1(-121.14,-126.45) J9.7@-122.86,-136.06 ; J9.7@-122.86,-136.06 J9.7@-123.84,-140.49 -122.86,-140.49 J9.7@-122.86,-136.06
  Inner Layer 2 w3.94: v3(-178.87,-75.87) -178.87,-108.9 -158.34,-129.43 -127.9,-129.43 v1(-121.14,-126.45)
  Inner Layer 3 w3.94: v2(-519.5,346.55) -505.82,346.55 -480.58,321.31 -480.58,238.92 -476.28,234.62 -476.28,74.48 -456.08,54.28 -305.06,54.28 -251.52,0.74 -214.29,0.74 -173.72,-39.83 -173.72,-70.72 v3(-178.87,-75.87)
  Bottom w3.94: J7.3@-519.55,344.47 v2(-519.5,346.55)
GH3020_RES: J7.4 J9.2 | length 867.1
  Top w3.94: v1(-185.61,-159.49) -151.4,-193.7 J9.2@-151.4,-210.33
  Inner Layer 2 w3.94: v3(-264.57,-52.21) -259.84,-52.21 -229.52,-82.53 -229.52,-136.95 -202.48,-163.99 -190.85,-163.99 v1(-185.61,-159.49)
  Inner Layer 3 w3.94: v2(-506.45,331.87) -506.45,318.61 -524.91,300.15 -550.49,300.15 -560.43,290.21 -560.43,263.05 -516.1,218.72 -516.1,57.74 -471.64,13.28 -324.82,13.28 -264.57,-46.97 v3(-264.57,-52.21)
  Bottom w3.94: v2(-506.45,331.87) -506.45,344.47 J7.4@-505.78,344.47